# EAGLE board tetris_mega_5 (EAGLE 6.2)
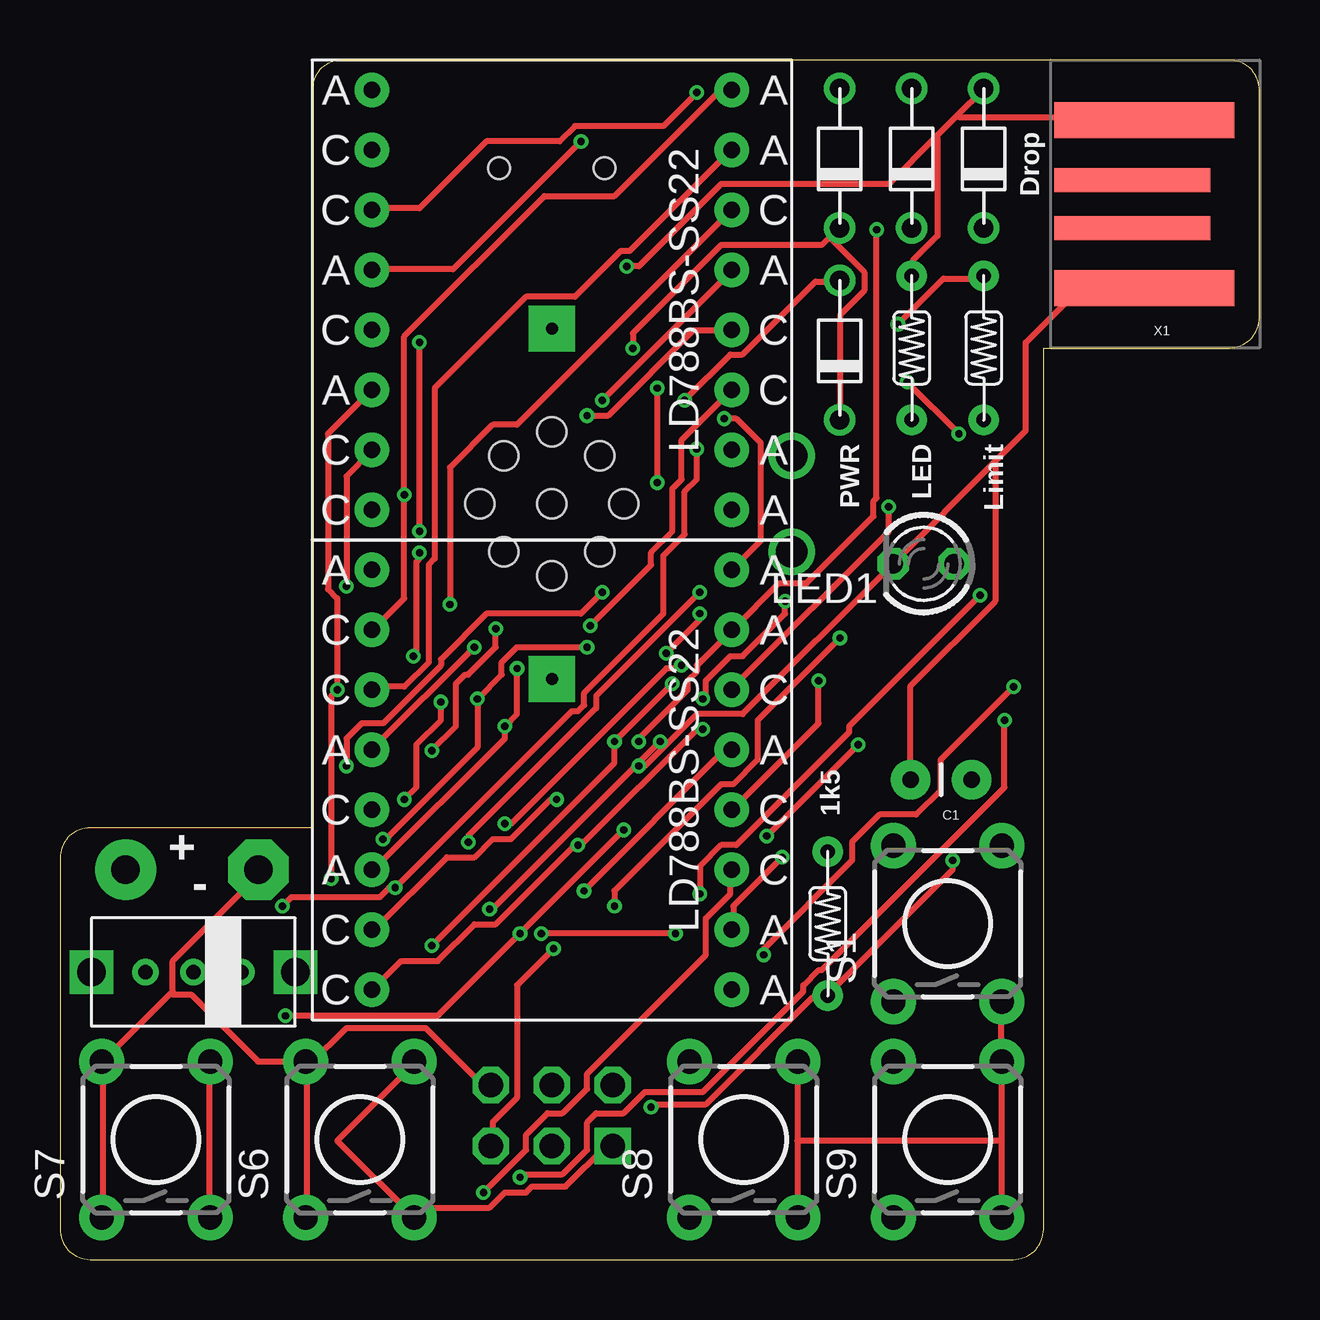
[diagram p0: board, top side]
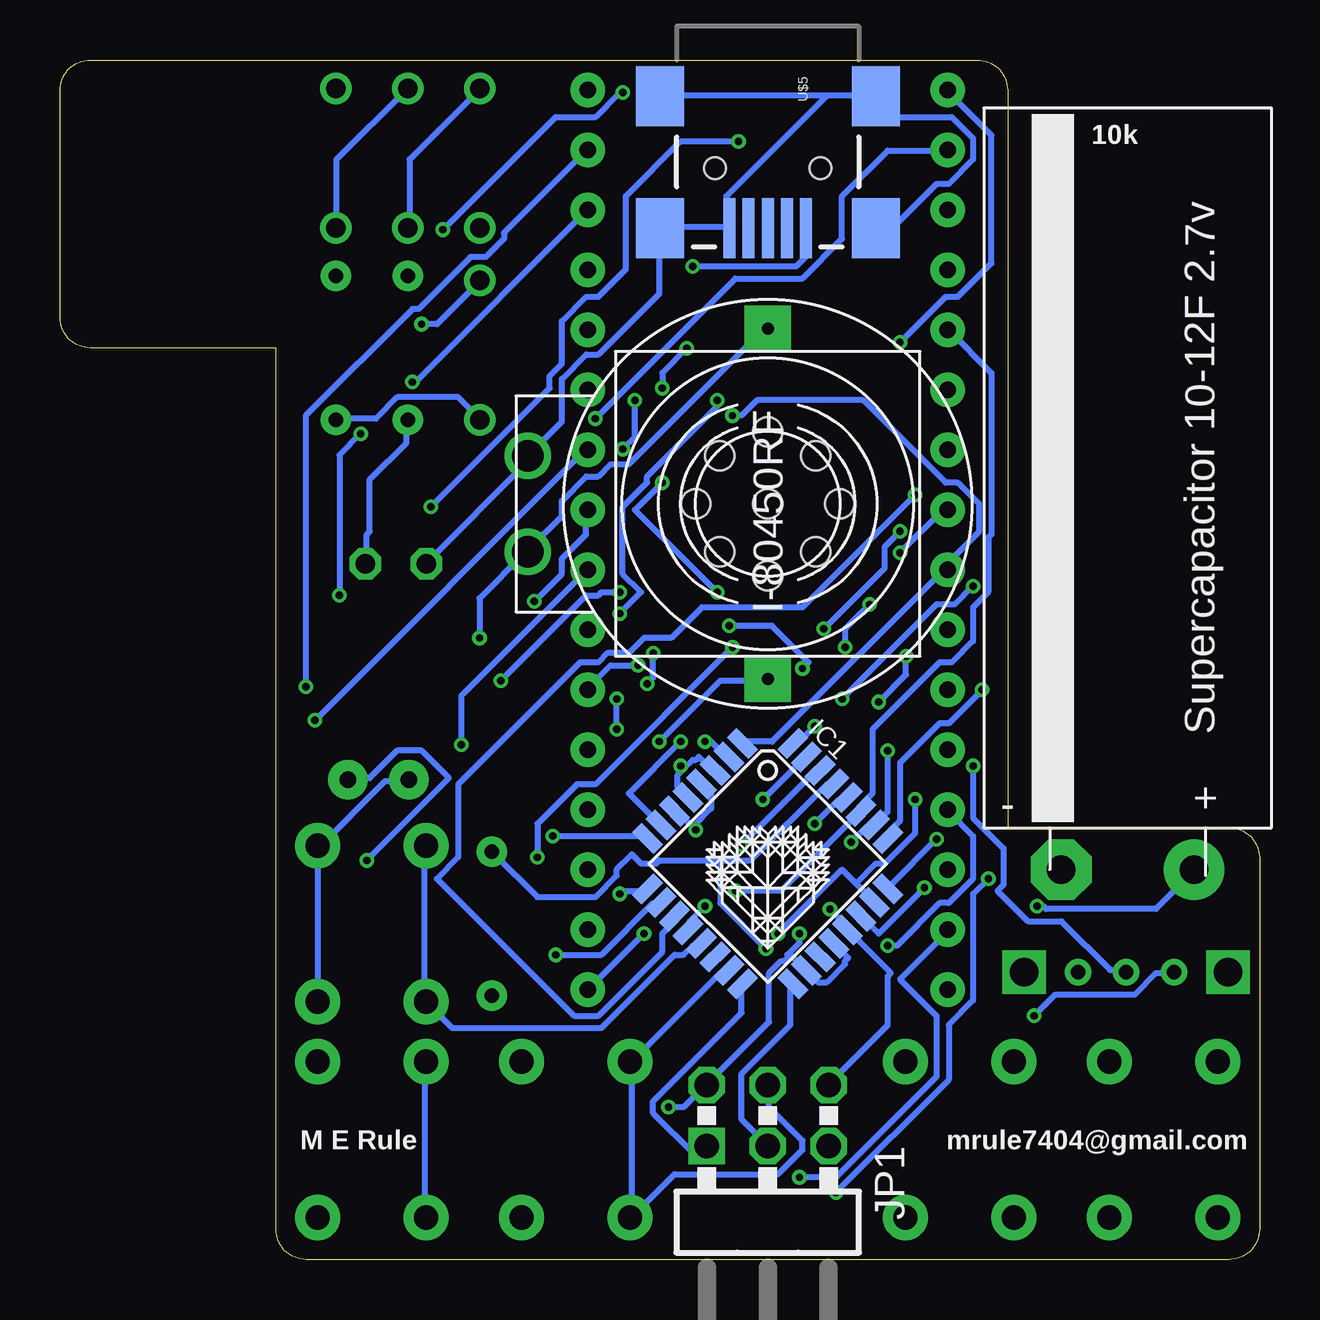
[diagram p1: board, bottom side, seen from below]

Size 50 x 50 mm. Coordinates in mm from the lower left corner, seen from the top.
Outline: 50,39.27 50,48.73 arc90 48.73,50 11.77,50 arc90 10.5,48.73 10.5,18 1.27,18 arc90 0,16.73 0,1.27 arc90 1.27,0 39.73,0 arc90 41,1.27 41,38 48.73,38 arc90 50,39.27
Copper layers (1*16): Top 0.035mm / dielectric 1.5mm / Bottom 0.035mm
Design rules: minimum track width 10mil, minimum drill 12mil, track to track 7mil, track to pad 7mil, pad to pad 7mil, via to via 7mil, smd to smd 0mil, copper to edge 20mil, drill to drill 10mil, minimum pad ring 10mil, minimum via ring 6mil, stop-mask expansion 2mil, vias tented up to drill 100mil, thermal gap 10mil
Holes 1.2 mm at 20.5,31.5 20.5,34.5 20.5,28.5 23.5,31.5 17.5,31.5 18.5,33.5 22.5,33.5 18.5,29.5 22.5,29.5

## Footprints (pad centres in the part's own frame; a part is rotated, then mirrored left to right if it is on the bottom)
CAP-PTH-SMALL = drill 0.7 pad 1.651: 1 0,0; 2 2.54,0
TQFP32-08 = smd 1.27 x 0.559: 1 -4.293,2.8; 2 -4.293,2; 3 -4.293,1.2; 4 -4.293,0.4; 5 -4.293,-0.4; 6 -4.293,-1.2; 7 -4.293,-2; 8 -4.293,-2.8; 17 4.293,-2.8; 18 4.293,-2; 19 4.293,-1.2; 20 4.293,-0.4; 21 4.293,0.4; 22 4.293,1.2; 23 4.293,2; 24 4.293,2.8 | smd 0.559 x 1.27: 9 -2.8,-4.293; 10 -2,-4.293; 11 -1.2,-4.293; 12 -0.4,-4.293; 13 0.4,-4.293; 14 1.2,-4.293; 15 2,-4.293; 16 2.8,-4.293; 25 2.8,4.293; 26 2,4.293; 27 1.2,4.293; 28 0.4,4.293; 29 -0.4,4.293; 30 -1.2,4.293; 31 -2,4.293; 32 -2.8,4.293
AVR-ISP-6R = drill 1.016 square: 1 -2.54,-1.27 | drill 1.016 octagon: 2 -2.54,1.27; 3 0,-1.27; 4 0,1.27; 5 2.54,-1.27; 6 2.54,1.27
LED3MM = drill 0.813 octagon: A -1.27,0; K 1.27,0
TACTILE-PTH = drill 1.016 pad 1.88: 1 -3.251,2.261; 2 3.251,2.261; 3 -3.251,-2.261; 4 3.251,-2.261
LD788BS-SS22 = drill 0.7 pad 1.422: A1 -7.5,8.75; A2 -7.5,1.25; A3 -7.5,-3.75; A4 7.5,8.75; A5 7.5,6.25; A6 7.5,1.25; A7 7.5,-6.25; A8 7.5,-8.75; C1 -7.5,6.25; C2 -7.5,3.75; C3 -7.5,-1.25; C4 -7.5,-6.25; C5 -7.5,-8.75; C6 7.5,3.75; C7 7.5,-1.25; C8 7.5,-3.75
PIEZO_ROUND_ENCASED_PTH = drill 1.3: P$1 10,2; P$2 10,-2
ISK4.1K_I-80450RF_I2G = drill 0.5 pad 1.93 square: P$1 -7.303,0; P$2 7.303,0
USB-MINIB = smd 2.5 x 0.5: D+ 2.5,0; D- 2.5,0.8; GND 2.5,-1.6; ID 2.5,-0.8; VBUS 2.5,1.6 | smd 2.5 x 2: MTN1 -3,4.5; MTN2 2.5,4.5; MTN3 -3,-4.5; MTN4 2.5,-4.5 | hole 0.9: 0,2.2; 0,-2.2
NICHICON_10X30 = drill 1.2 pad 2.54 octagon: P$1 3.23,-1.75 | drill 1.2 pad 2.54: P$2 8.77,-1.75
R-6 = drill 0.6 pad 1.27: P$1 -3,0; P$2 3,0
D-7.5 = drill 0.813: A 2.81,0; C -3,0
SWITCH2 = drill 0.6: 1 -0.02,1.94; 2 -0.02,-0.06; 3 -0.02,-2.06 | drill 1.2 square: C1 -0.02,4.19; C2 -0.02,-4.31
USB-A-PCB = smd 7.5 x 1.5: 5V -0.2,-3.5; GND -0.2,3.5 | smd 6.5 x 1: USB_M 0.3,-1; USB_P 0.3,1

## Placement (x,y rotation side)
C1  [CAP-PTH-SMALL]  38,20 180 top
IC1  MEGA8-AI  [TQFP32-08]  20.5,16.5 315 bottom
JP1  AVR-ISP-6R  [AVR-ISP-6R]  20.5,6 0 bottom
LED1  [LED3MM]  36,29 180 top
S1  [TACTILE-PTH]  37,14 90 top
S6  [TACTILE-PTH]  12.5,5 90 top
S7  [TACTILE-PTH]  4,5 90 top
S8  [TACTILE-PTH]  28.5,5 90 top
S9  [TACTILE-PTH]  37,5 90 top
U$1  LD788BS-SS22  [LD788BS-SS22]  20.5,20 0 top
U$2  LD788BS-SS22  [LD788BS-SS22]  20.5,40 0 top
U$3  PIEZO_ROUND_PTH  [PIEZO_ROUND_ENCASED_PTH]  20.5,31.5 180 bottom
U$4  I-80450RF  [ISK4.1K_I-80450RF_I2G]  20.5,31.5 270 bottom
U$5  USB-MINIB-5PIN  [USB-MINIB]  20.5,45.5 270 bottom
U$6  NICHICON_12F  [NICHICON_10X30]  11.5,18 0 bottom
U$7  R-6  [R-6]  32,14 270 top
U$8  D-6  [D-7.5]  38.5,46 90 top
U$9  D-6  [D-7.5]  35.5,46 90 top
U$10  D-6  [D-7.5]  32.5,46 90 top
U$11  R-6  [R-6]  38.5,38 270 top
U$12  D-6  [D-7.5]  32.5,38 90 top
U$13  [LOGO]  20.5,15.5 0 bottom
U$15  SPST_PTH  [SWITCH2]  5.5,12 90 top
U$17  R-6  [R-6]  35.5,38 270 top
X1  USBPCB  [USB-A-PCB]  45,44 180 top

## Library data of the parts
C1 S1 S6-S9 U$5 X1 = SparkFun
IC1 = atmel
JP1 = avr-5-4.16
LED1 = led
U$1-U$4 U$6-U$12 U$15 U$17 = mrule
U$13 = mrule2

## Nets
GND: C1.2 IC1.3 IC1.5 IC1.21 JP1.6 LED1.K S1.3 S1.4 S6.1 S6.2 S7.1 S7.2 S8.3 S8.4 S9.3 S9.4 U$3.P$2 U$4.P$2 U$5.GND U$5.MTN1 U$5.MTN2 U$5.MTN3 U$5.MTN4 U$6.P$1 X1.GND
N$1: IC1.23 U$1.A8 U$2.C5
N$2: IC1.24 U$1.A7 U$2.C4
N$3: IC1.25 U$1.C8 U$2.A3
N$4: IC1.30 U$1.C5 U$2.A8
N$5: IC1.31 U$1.C4 U$2.A7
N$6: IC1.32 U$1.A3 U$2.C8
N$7: IC1.8 U$1.A4 U$2.C1
N$8: IC1.7 U$1.A5 U$2.C2
N$9: IC1.28 U$1.C6 U$2.A2
N$10: IC1.27 U$1.A6 U$2.C3
N$11: IC1.11 U$1.C1 U$2.A4
N$12: IC1.10 U$1.C2 U$2.A5
N$13: IC1.9 U$1.A2 U$2.C6
N$14: IC1.2 U$1.C3 U$2.A6
N$15: IC1.1 U$1.A1 U$2.C7
N$16: IC1.26 U$1.C7 U$2.A1
N$17: IC1.29 JP1.5 U$7.P$1
N$19: U$8.C U$9.A
N$20: U$9.C U$10.A
N$21: IC1.17 JP1.3
N$22: IC1.14
N$23: IC1.16 JP1.1 S6.3 S6.4
N$24: U$5.VBUS U$8.A U$17.P$1 X1.5V
N$25: S9.1 S9.2
N$26: S7.3 S7.4
N$27: IC1.13 S1.1 S1.2
N$28: IC1.12 U$3.P$1 U$4.P$1
N$30: U$10.C U$11.P$2 U$12.C U$15.2
N$31: IC1.22 U$6.P$2 U$11.P$1 U$12.A
N$34: LED1.A U$17.P$2
N$35: IC1.15 JP1.4 S8.1 S8.2
VCC: C1.1 IC1.4 IC1.6 IC1.18 IC1.20 JP1.2 U$7.P$2 U$15.1

## Tracks (layer width: path | path; a pad name or v marks a point on that pad's centre or on a via)
GND  (via drill 0.3)
  Top 0.254: S6.1 10.29,1.78 10.29,8.13 S6.2 | JP1.6 17.91,7.37 17.53,7.37 15.24,9.65 11.94,9.65 10.41,8.13 S6.2 | S7.1 1.78,1.78 1.78,8.13 S7.2 1.78,8.26 4.64,11.11 | 4.64,11.11 4.7,11.18 4.7,12.45 8.26,16 8.26,16.13 U$6.P$1 | S6.2 10.16,8.26 8.26,8.26 5.46,11.05 4.7,11.05 4.64,11.11 | 30.73,4.95 30.73,8.13 S8.4 | 30.73,4.95 30.73,1.78 S8.3 | 35.43,20.07 C1.2 35.43,20.19 35.43,23.88 38.99,27.43 38.99,33.15 38.92,33.21 | 39.24,4.95 39.24,8.13 S9.4 39.24,8.26 39.24,10.67 S1.3 | 39.24,4.95 39.24,1.78 S9.3 | 39.24,4.95 30.73,4.95 | v24.13,20.57 24.38,20.57 25.21,21.4 | 25.21,21.4 26.54,22.73 28.45,22.73 34.67,28.96 LED1.K 34.8,29.08 38.92,33.21 | 25.21,21.4 v25.02,21.59 18.03,14.61 v17.91,14.61 | 38.92,33.21 40.26,34.54 40.26,38.23 42.42,40.39 45.09,40.39 X1.GND
  Bottom 0.254: 17.27,13.84 IC1.21 | IC1.21 17.14,13.72 15.37,11.94 15.49,11.81 15.49,9.78 17.91,7.37 JP1.6 | C1.2 35.56,19.94 36.45,19.94 39.24,17.14 S1.4 39.24,17.02 39.24,10.79 S1.3 | U$5.MTN2 15.88,43.05 15.24,43.05 13.46,44.83 12.95,44.83 11.94,45.85 11.94,46.74 12.83,47.62 15.11,47.62 15.88,48.39 U$5.MTN1 16,48.51 18.03,48.51 | 18.03,48.51 24.89,48.51 U$5.MTN3 | 18.03,48.51 22.23,44.32 22.23,43.18 U$5.GND 22.23,43.05 24.89,43.05 U$5.MTN4 25.02,42.93 25.02,40.26 27.56,37.72 28.07,37.72 29.08,36.7 29.08,34.92 30.48,33.53 U$3.P$2 30.61,33.4 30.61,33.15 34.67,29.08 LED1.K | 22.73,20.45 IC1.3 22.86,20.45 23.37,20.95 23.5,20.83 23.62,20.83 23.94,20.51 | 23.94,20.51 24.26,20.19 24.26,19.68 23.88,19.3 IC1.5 | v24.13,20.57 24,20.57 23.94,20.51 | v25.02,21.59 22.48,24.13 20.57,24.13 U$4.P$2 | v17.91,14.61 17.27,13.97 IC1.21
N$1  (via drill 0.3)
  Top 0.254: v25.65,13.59 v20.07,13.59 | v14.99,29.46 14.99,29.21 14.86,29.08 14.86,25.27 v14.73,25.15 | v15.88,23.24 15.88,22.48 14.86,21.46 14.86,19.68 v14.35,19.18
  Bottom 0.254: 16.83,15.68 17.4,16.26 v20.07,13.59 | 16.83,15.68 16.13,14.99 IC1.23 | v25.65,13.59 27.94,11.3 U$1.A8 | v14.99,29.46 13.21,31.24 13.08,31.24 U$2.C5 | v14.73,25.15 14.73,24.38 v15.88,23.24 | v14.35,19.18 14.35,17.78 15.62,16.51 16,16.51 16.83,15.68
N$2  (via drill 0.3)
  Top 0.254: v13.46,17.53 13.59,17.53 17.4,21.34 v17.4,23.37 18.41,24.38 18.41,24.89 19.05,25.53 v21.97,25.53 | v11.94,28.07 11.94,32.64 12.95,33.66 U$2.C4 | v30.1,16.76 28.07,14.73 28.07,13.84 U$1.A7
  Bottom 0.254: v13.46,17.53 15.37,15.62 15.37,15.49 IC1.24 | v17.4,23.37 13.46,27.3 12.7,27.3 v11.94,28.07 | v30.1,16.76 30.1,18.16 28.45,19.81 27.69,19.81 v21.97,25.53
N$3  (via drill 0.3)
  Top 0.254: U$2.A3 12.95,36.2 11.18,34.42 11.18,27.94 11.56,27.56 v11.56,23.75 11.3,23.5 v11.3,15.88 | v17.65,2.79 19.43,4.57 19.43,5.21 20.32,6.1 20.95,6.1 21.97,7.11 21.97,7.75 26.92,12.7 26.92,14.22 27.94,15.24 27.94,16.13 U$1.C8
  Bottom 0.254: v11.56,23.75 12.95,22.35 13.34,22.35 14.99,20.7 14.99,18.29 15.37,17.91 15.37,17.65 IC1.25 | v17.65,2.79 12.95,7.49 12.95,9.78 11.94,10.79 11.94,15.24 v11.3,15.88
N$4  (via drill 0.3)
  Top 0.254: U$1.C5 13.08,11.3 14.22,12.45 15.75,12.45 17.27,13.97 18.16,13.97 21.46,17.27 v21.59,17.27 21.72,17.27 26.54,22.1 v26.8,22.1 | v30.23,27.43 30.23,26.92 28.45,25.15 27.94,25.15 26.92,24.13 26.92,23.5 v26.8,23.37
  Bottom 0.254: v21.59,17.27 18.54,20.32 18.41,20.32 IC1.30 | v30.23,27.43 29.08,28.57 29.08,29.21 28.07,30.23 28.07,31.24 U$2.A8 | v26.8,22.1 v26.8,23.37
N$5  (via drill 0.3)
  Top 0.254: v20.7,19.18 20.45,19.18 18.8,17.53 18.03,17.53 17.27,16.76 16.13,16.76 13.08,13.72 U$1.C4 | v39.37,22.48 39.37,19.68 31.75,12.06 31.62,12.06 30.99,11.43 30.99,11.18 26.8,6.99 24.38,6.99 23.5,6.1 22.35,6.1 21.97,5.71 21.97,4.57 20.95,3.56 19.3,3.56 v19.18,3.43
  Bottom 0.254: v20.7,19.18 19.05,20.83 18.92,20.83 IC1.31 | v39.37,22.48 28.19,33.66 28.07,33.66 U$2.A7 | v19.18,3.43 17.65,3.43 13.46,7.62 13.46,10.16 14.99,11.68 12.95,13.72 U$1.C4
N$6  (via drill 0.3)
  Top 0.254: U$1.A3 13.08,16.26 18.54,21.72 v18.54,22.23 19.05,22.73 v19.05,24.64 | v22.1,26.42 24.64,28.96 24.64,29.46 25.53,30.35 25.53,32.13 25.91,32.51 25.91,34.16 27.94,36.2 U$2.C8
  Bottom 0.254: v18.54,22.23 19.18,21.59 19.43,21.59 IC1.32 | v22.1,26.42 20.32,26.42 18.8,24.89 v19.05,24.64
N$7  (via drill 0.3)
  Top 0.254: v33.27,21.46 v29.46,17.65 | v27.69,35.05 28.19,35.05 29.21,34.04 29.21,29.97 28.07,28.83 U$1.A4
  Bottom 0.254: v29.46,17.65 25.53,17.65 IC1.8 | v33.27,21.46 33.27,23.5 28.07,28.7 U$1.A4 | v27.69,35.05 21.84,40.89 19.05,40.89 17.4,42.55 17.4,44.32 15.49,46.23 13.08,46.23 U$2.C1
N$8  (via drill 0.3)
  Top 0.254: v24.13,21.59 24.13,21.72 26.16,23.75 26.16,24.13 26.54,24.51 26.54,24.77 27.94,26.16 U$1.A5 28.07,26.29 29.97,28.19 31.11,28.19 33.91,30.99 33.91,31.62 34.04,31.75 v34.04,42.93 | v26.54,48.64 25.15,47.24 21.46,47.24 20.83,46.61 17.78,46.61 14.99,43.81 13.08,43.81 U$2.C2
  Bottom 0.254: v24.13,21.59 26.29,19.43 25.02,18.16 IC1.7 | v26.54,48.64 26.67,48.64 27.69,47.62 29.34,47.62 v34.04,42.93
N$9  (via drill 0.3)
  Top 0.254: v18.54,18.16 18.8,18.16 25.27,24.64 25.78,24.64 v25.91,24.77 | v21.72,46.61 16.38,41.27 13.08,41.27 U$2.A2 | v34.54,31.37 34.54,30.35 28.07,23.88 U$1.C6
  Bottom 0.254: v18.54,18.16 17.53,19.18 17.27,19.18 IC1.28 | v25.91,24.77 27.05,24.77 27.94,23.88 U$1.C6 | v21.72,46.61 24.13,46.61 26.42,44.32 26.42,41.27 27.56,40.13 28.07,40.13 29.08,39.12 29.08,37.34 29.59,36.83 29.59,36.32 v34.54,31.37
N$10  (via drill 0.3)
  Top 0.254: v21.84,15.37 27.69,21.21 27.94,21.21 U$1.A6
  Bottom 0.254: U$2.C3 12.95,38.73 11.18,36.96 11.18,30.23 11.3,30.1 11.3,27.81 11.94,27.18 11.94,25.78 12.83,24.89 13.34,24.89 16.13,22.1 16.13,19.43 16.51,19.05 16.51,18.8 IC1.27 16.64,18.67 19.94,15.37 v21.84,15.37
N$11  (via drill 0.3)
  Top 0.254: U$1.C1 13.08,26.29 14.35,27.56 v14.35,31.88 14.35,38.48 20.19,44.32 23.11,44.32 27.43,48.64 27.94,48.64 U$2.A4
  Bottom 0.254: v14.35,31.88 19.05,27.18 23.24,27.18 24.51,25.91 25.65,25.91 26.29,25.27 27.18,25.27 27.56,24.89 28.32,24.89 33.4,19.81 33.4,16.76 34.29,15.88 28.57,10.16 27.56,10.16 24.89,12.83 24.89,13.59 24.38,14.1 24.38,14.22 IC1.11
N$12  (via drill 0.3)
  Top 0.254: v29.34,12.7 29.34,12.95 33.02,16.64 33.02,17.4 34.16,18.54 35.69,18.54 36.7,19.56 36.7,20.83 v39.75,23.88 | U$1.C2 13.08,23.88 14.35,23.88 15.37,24.89 15.37,28.96 15.62,29.21 15.62,36.32 19.43,40.13 21.46,40.13 23.37,42.04 23.75,42.04 27.94,46.23 U$2.A5
  Bottom 0.254: v29.34,12.7 27.43,12.7 25.27,14.86 25.02,14.86 IC1.10 | v39.75,23.88 39.75,35.18 35.31,39.62 35.05,39.62 32.89,41.78 32.26,41.78 31.5,42.55 31.5,42.8 28.07,46.23 U$2.A5
N$13  (via drill 0.3)
  Top 0.254: v26.67,15.24 26.67,16.38 27.56,17.27 28.19,17.27 32.89,21.97 32.89,22.23 v38.35,27.69 | v35.31,36.58 v37.47,34.42 | v17.27,25.53 13.08,21.34 U$1.A2 | v16.26,27.3 16.26,33.02 18.03,34.8 19.05,34.8 27.94,43.69 U$2.C6
  Bottom 0.254: v26.67,15.24 26.54,15.37 25.53,15.37 IC1.9 | v38.35,27.69 38.35,33.53 v37.47,34.42 | v35.31,36.58 35.18,36.58 28.07,43.69 U$2.C6 | v17.27,25.53 17.27,26.29 v16.26,27.3
N$14  (via drill 0.3)
  Top 0.254: v15.49,13.08 23.11,20.7 v23.11,21.59 v25.53,24 | v22.61,35.81 27.94,41.15 U$2.A6 | v26.67,26.92 26.67,26.67 v25.27,25.27
  Bottom 0.254: v23.11,21.59 22.99,21.72 22.23,20.95 IC1.2 | v15.49,13.08 15.11,13.08 13.34,14.86 12.95,14.86 11.94,15.88 11.94,17.65 12.95,18.67 U$1.C3 | v22.61,35.81 22.61,35.56 25.53,32.64 25.53,32.38 26.54,31.37 26.54,28.57 25.78,27.81 v26.67,26.92 | v25.27,25.27 25.27,24.26 v25.53,24
N$15  (via drill 0.3)
  Top 0.254: v21.97,35.18 22.86,35.18 26.42,38.73 27.94,38.73 U$2.C7
  Bottom 0.254: IC1.1 21.46,21.59 20.32,21.59 13.08,28.83 U$1.A1 13.08,28.96 11.68,30.35 11.68,31.5 12.57,32.38 13.08,32.38 16.51,35.81 20.95,35.81 21.59,35.18 v21.97,35.18
N$16  (via drill 0.3)
  Top 0.254: v17.02,17.4 17.02,17.65 22.35,22.99 22.35,23.5 v26.67,27.81 | v31.62,24.13 31.62,22.35 28.07,18.8 U$1.C7 | v14.99,30.35 v14.99,38.23 | v18.16,26.29 18.16,25.53 17.02,24.38 16.89,24.38 16.51,24 16.51,22.23 v15.49,21.21
  Bottom 0.254: v17.02,17.4 16.38,18.03 16.13,18.03 IC1.26 16,18.16 15.49,18.67 v15.49,21.21 | v26.67,27.81 27.43,27.81 27.56,27.69 28.07,27.69 v31.62,24.13 | v14.99,38.23 13.08,40.13 12.57,40.13 11.18,41.53 11.18,46.86 12.95,48.64 U$2.A1 | v14.99,30.35 15.62,29.72 15.62,28.83 v18.16,26.29
N$17  (via drill 0.3)
  Top 0.254: v20.57,12.95 19.05,11.43 19.05,6.73 18.03,5.71 18.03,4.83 JP1.5
  Bottom 0.254: 22.48,16.64 25.02,16.64 25.15,16.51 25.78,16.51 26.16,16.89 26.8,16.26 26.8,16 27.69,15.11 30.1,15.11 31.88,16.89 U$7.P$1 | 22.48,16.64 21.21,16.64 18.03,19.81 17.78,19.81 IC1.29 | v20.57,12.95 22.48,14.86 22.48,16.64
N$19
  Bottom 0.254: U$8.C 38.48,43.05 38.48,45.85 35.56,48.77 U$9.A
N$20
  Bottom 0.254: U$9.C 35.43,43.05 35.43,45.85 32.51,48.77 U$10.A
N$21
  Bottom 0.254: IC1.17 19.56,11.43 19.56,9.78 21.59,7.75 21.59,5.84 20.57,4.83 JP1.3
N$23
  Top 0.254: S6.4 14.73,8.13 11.56,4.95 14.73,1.78 S6.3 14.86,1.78 15.24,2.16 17.91,2.16 18.54,2.79 19.43,2.79 19.68,3.05 21.08,3.05 22.73,4.7 22.99,4.7 JP1.1
  Bottom 0.254: IC1.16 21.59,11.43 21.59,10.29 25.27,6.6 25.27,6.1 23.5,4.32 23.11,4.7 JP1.1
N$24  (via drill 0.3)
  Top 0.254: v23.62,41.4 24.13,41.4 27.56,44.83 34.54,44.83 36.51,46.8 | 37.4,47.69 38.48,48.77 U$8.A | 37.4,47.69 36.51,46.8 | U$17.P$1 35.56,41.02 35.56,41.66 36.58,42.67 36.58,46.74 36.51,46.8 | X1.5V 45.09,47.62 37.47,47.62 37.4,47.69
  Bottom 0.254: v23.62,41.4 19.3,41.4 18.92,41.78 18.92,42.93 U$5.VBUS
N$25
  Bottom 0.254: S9.1 34.8,1.78 34.8,8.13 S9.2
N$26
  Top 0.254: S7.3 6.22,1.78 6.22,8.13 S7.4
N$27
  Bottom 0.254: IC1.13 23.37,13.08 23.62,13.08 24,12.7 24.38,12.7 27.43,9.65 33.66,9.65 34.67,10.67 S1.1 34.8,10.79 34.8,17.14 S1.2
N$28  (via drill 0.3)
  Top 0.254: v23.11,14.73 23.11,15.37 27.56,19.81 28.07,19.81 29.08,20.83 29.08,22.48 v32.51,25.91
  Bottom 0.254: v23.11,14.73 23.75,14.1 23.75,13.84 IC1.12 | v32.51,25.91 32.51,27.56 30.61,29.46 U$3.P$1 30.48,29.59 29.08,30.99 29.08,31.62 28.07,32.64 27.56,32.64 27.05,33.15 26.29,33.15 20.7,38.73 20.57,38.73 U$4.P$1
N$30  (via drill 0.3)
  Top 0.254: v11.94,20.57 11.94,21.72 12.57,22.35 13.46,22.35 15.88,24.77 15.88,25.02 17.78,26.92 21.72,26.92 v22.61,27.81 | v24.89,36.32 v24.89,32.38 | v23.88,37.97 23.88,38.61 27.56,42.29 31.75,42.29 32.38,42.93 U$10.C 32.13,42.55 33.53,41.15 33.53,40.39 32.51,39.37 32.51,35.05 U$12.C
  Bottom 0.254: U$11.P$2 38.48,35.05 36.83,35.05 35.94,35.94 33.4,35.94 32.51,35.05 U$12.C | v11.94,20.57 11.94,18.41 10.67,17.14 10.67,15.62 10.92,15.37 9.65,14.1 8.26,14.1 6.22,12.06 5.59,12.06 U$15.2 | v22.61,27.81 26.04,31.24 v24.89,32.38 | v24.89,36.32 24.89,36.96 v23.88,37.97
N$31  (via drill 0.3)
  Top 0.254: v34.92,38.99 36.83,40.89 38.48,40.89 U$11.P$1 | v9.27,14.73 9.65,15.11 13.34,15.11 13.72,15.49 v13.97,15.49 21.34,22.86 21.59,22.86 21.84,23.11 21.84,23.62 25.15,26.92 25.15,29.34 26.04,30.23 26.04,32 26.54,32.51 v26.54,33.78 | v26.04,35.81 27.94,37.72 28.45,37.72 31.5,40.77 32.38,40.77 U$12.A
  Bottom 0.254: v34.92,38.99 34.29,38.99 32.51,40.77 U$12.A | v13.97,15.49 15.88,13.59 16.51,14.22 IC1.22 | v9.27,14.73 9.02,14.73 8.89,14.61 4.32,14.61 2.79,16.13 U$6.P$2 | v26.04,35.81 26.04,34.29 v26.54,33.78
N$34
  Bottom 0.254: U$17.P$2 35.56,34.92 35.56,34.04 37.08,32.51 37.08,30.35 37.21,30.23 37.21,29.08 LED1.A
N$35
  Bottom 0.254: IC1.15 22.23,11.94 22.48,11.94 26.16,8.26 S8.2 26.16,8.13 26.16,1.91 S8.1 26.16,1.78 24.38,3.56 20.07,3.56 19.05,4.57 19.05,4.95 20.45,6.35 20.45,7.24 JP1.4
VCC  (via drill 0.3)
  Top 0.254: 37.97,20.07 C1.1 | v23.5,17.91 v19.18,13.59 15.75,10.16 v9.4,10.16 | v24.64,6.35 24.77,6.48 26.92,6.48 31.37,10.92 31.88,10.92 U$7.P$2 32,11.05 37.21,16.26 v37.21,16.64
  Bottom 0.254: 24.38,18.8 IC1.6 24.26,18.67 23.62,18.03 23.56,18.1 | 23.56,18.1 22.86,18.8 22.86,19.43 IC1.4 | IC1.20 17.65,13.08 17.14,12.57 17.27,12.45 17.27,12.32 18.03,11.56 18.41,11.56 18.8,11.94 IC1.18 18.92,12.06 19.56,12.7 19.62,12.64 | 19.62,12.64 19.81,12.45 19.94,12.45 20.45,11.94 20.45,9.91 22.99,7.37 JP1.2 23.11,7.24 24,6.35 v24.64,6.35 | v23.5,17.91 23.5,18.03 23.56,18.1 | v19.18,13.59 19.18,13.21 19.68,12.7 19.62,12.64 | v9.4,10.16 8.51,11.05 5.21,11.05 4.32,11.94 3.68,11.94 U$15.1 | v37.21,16.64 33.78,20.07 34.92,21.21 35.94,21.21 37.08,20.07 37.97,20.07 C1.1

## Text on the board
tPlace: Drop | PWR | LED | Limit | 1k5 | + | -
bPlace: 10k | mrule7404@gmail.com | M E Rule